# Altium PCB PCB1.PcbDoc
Units mm, origin at the board's own origin, x right, y up, seen from the top; angles counter-clockwise.
Board outline 152.4 x 101.6 mm, 2 copper layers (Top Layer, Bottom Layer); 35 components, 52 nets, 168 pads, 0 vias.
Unrouted connection lines stored in the file: 116.
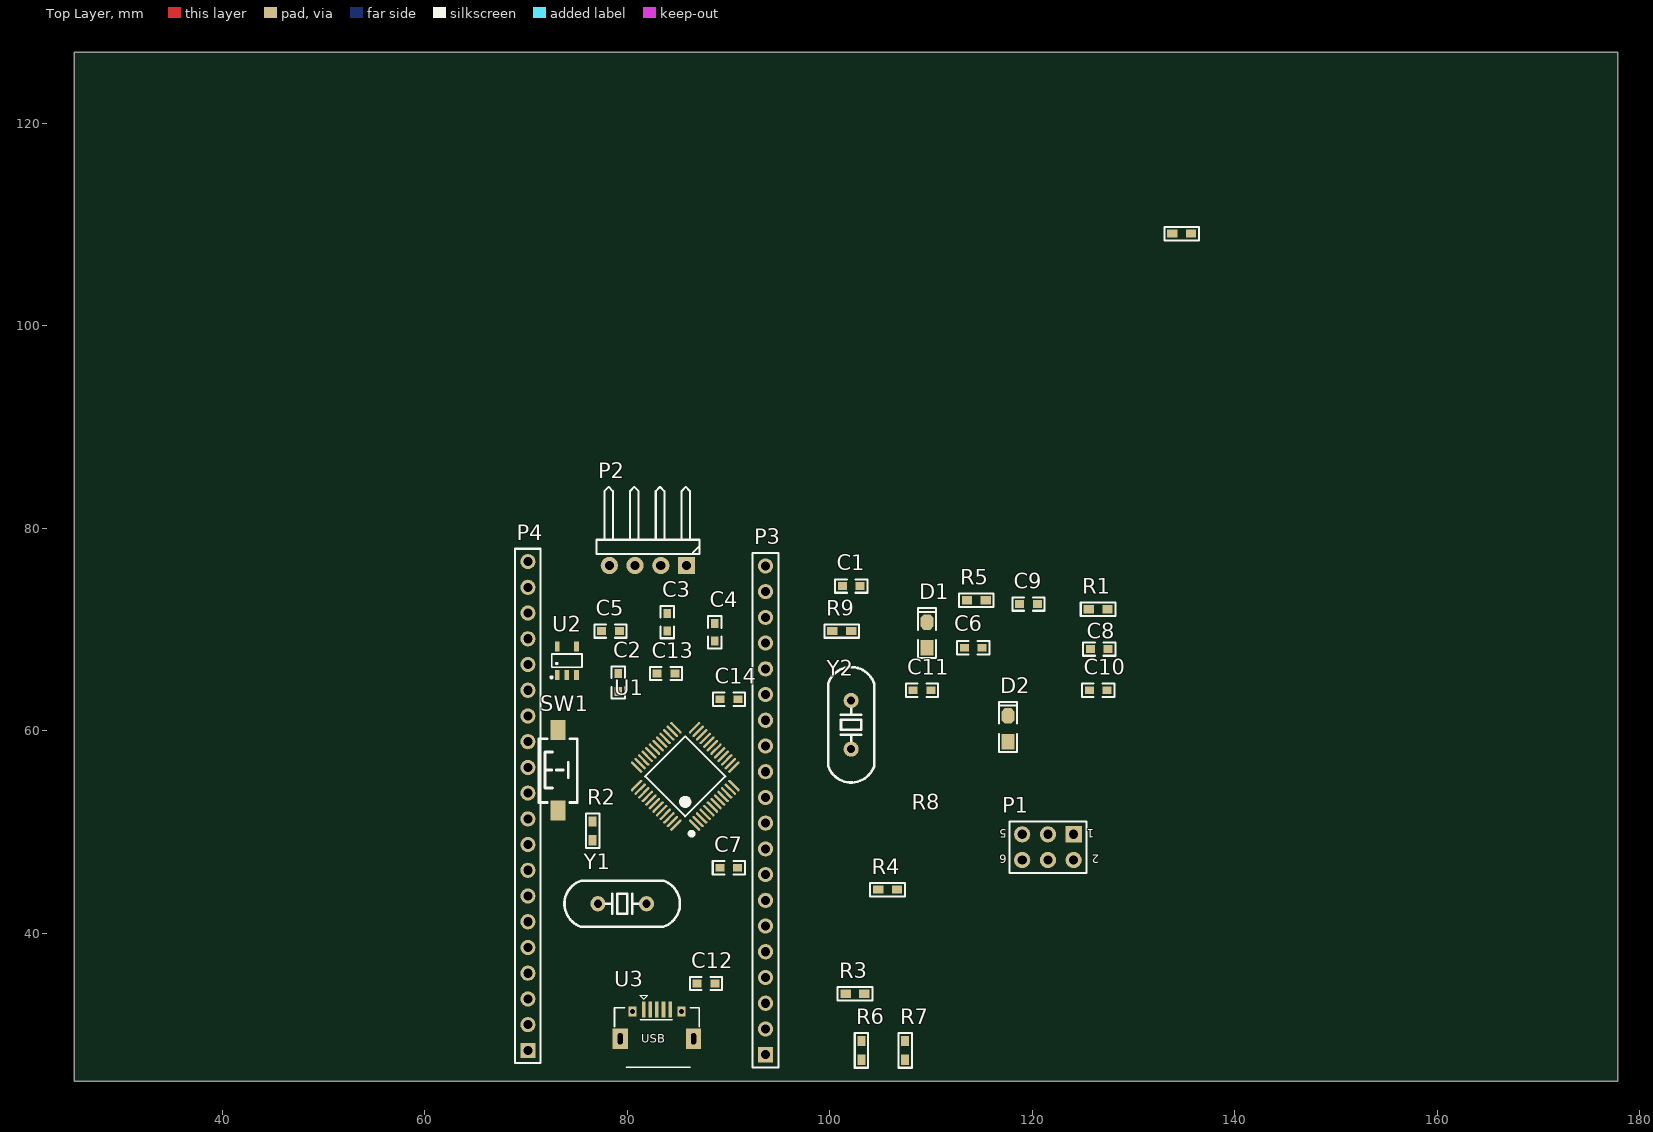
[diagram p0: Top Layer view]
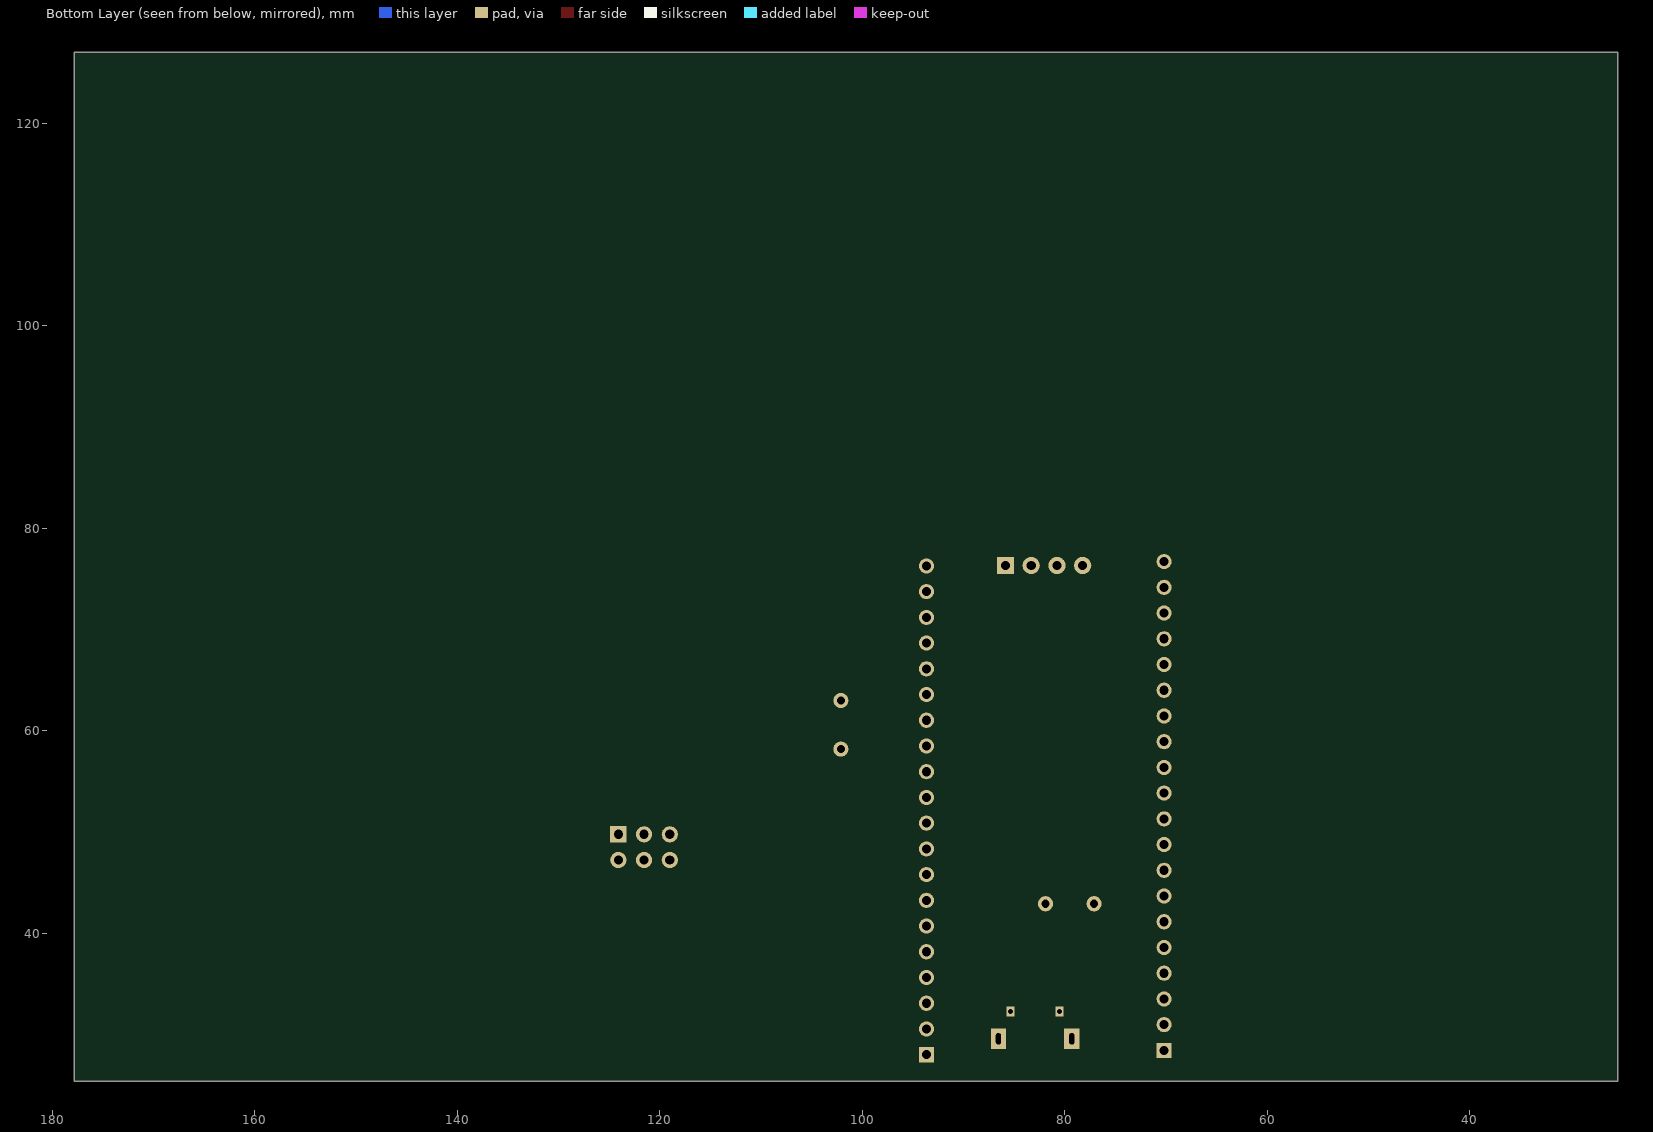
[diagram p1: Bottom Layer view, seen from below]

## Layer stack, top to bottom
Top Solder: solder mask 0.0102, Solder Resist, Dk 3.5
Top Layer: signal copper 0.0356
Dielectric 1: dielectric 0.32, FR-4, Dk 4.8
Bottom Layer: signal copper 0.0356
Bottom Solder: solder mask 0.0102, Solder Resist, Dk 3.5

## Board outline
25.4,25.4 177.8,25.4 177.8,127 25.4,127

## Design rules (kind name [scope] priority, off if disabled: settings)
Clearance [All] p1: gap=0.254 ignorepadtopadclearanceinfootprint=FALSE except(0: Arc-Hole Track-Hole SMDPad-Hole THPad-Hole Via-Hole Fill-Hole Poly-Hole Region-Hole Text-Hole)
PolygonConnect [All] p1: connectstyle=Relief reliefconductorwidth=0.254 reliefentries=4 polygonreliefangle="90 Angle" airgapwidth=0.254
RoomDefinition Sheet1 [InComponentClass('Sheet1')] p1: confinementstyle=ConfineIn formatcopy=TRUE lockcomponents=FALSE outline 135.433,47.625 316.586,47.625 316.586,101.473 135.433,101.473
RoutingVias [All] p1: holewidth=0.711 width=1.27 viastyle="Through Hole" minholewidth=0.711 minwidth=1.27 maxholewidth=0.711 maxwidth=1.27
SolderMaskExpansion [All] p1: expansion=0.102 istentingtop=FALSE
Width [All] p1: maxlimit=0.254 minlimit=0.254 preferedwidth=0.254
30 further rules are at their usual default settings.

## Components (designator, comment, footprint, x,y, rotation, side; value= is the part's Value field where it differs from the comment)
C1 "105 C0603" "C 0603" 102.133,74.295 r0 top value=104
C2 "105 C0603" "C 0603" 79.121,64.795 r90 top value=104
C3 "105 C0603" "C 0603" 83.947,70.739 r90 top value=104
C4 "105 C0603" "C 0603" 88.646,69.748 r90 top value=104
C5 "105 C0603" "C 0603" 78.359,69.85 r0 top value=104
C6 "105 C0603" "C 0603" 114.173,68.199 r0 top value=104
C7 "22P,C0603" "C 0603" 90.043,46.482 r0 top value=104
C8 "105 C0603" "C 0603" 126.619,68.072 r0 top value=104
C9 "105 C0603" "C 0603" 119.634,72.517 r0 top value=104
C10 "105 C0603" "C 0603" 126.492,64.008 r180 top value=104
C11 "105 C0603" "C 0603" 109.118,64.008 r0 top value=104
C12 "22P,C0603" "C 0603" 87.757,35.052 r180 top value=104
C13 "22P,C0603" "C 0603" 83.82,65.659 r180 top value=104
C14 "22P,C0603" "C 0603" 90.043,63.119 r180 top value=104
D1 "LED" "LED 0805G" 109.601,69.469 r90 top
D2 "LED" "LED 0805G" 117.602,60.198 r90 top
P1 "Header 3X2" HDR-3X2 124.079,49.784 r180 top
P2 "SWD" HDR-1X4_H 85.852,76.327 r180 top
P3 "Header 20" HDR1X20 93.658,28.023 r90 top
P4 "Header 20" HDR1X20 70.187,28.448 r90 top
R1 "10K R0603" "R 0603" 126.492,72.009 r0 top
R2 "10K R0603" "R 0603" 76.581,50.127 r90 top
R3 "10K R0603" "R 0603" 102.489,34.036 r0 top
R4 "10K R0603" "R 0603" 105.702,44.323 r0 top
R5 "10K R0603" "R 0603" 114.465,72.898 r0 top
R6 "20 R0603" "R 0603" 103.124,28.448 r270 top
R7 "20 R0603" "R 0603" 107.442,28.448 r90 top
R8 "4.7K R0603" "R 0603" 134.747,109.093 r0 top
R9 "1M, 0603" "R 0603" 101.181,69.85 r180 top
SW1 "SW-PB_V" "TSW SMD-3*6*2.5" 73.152,56.134 r90 top
U1 "stm32f103c8t6_48pin" "TQFP48 7x7_L" 85.725,55.499 r45 top
U2 "RT9193" SOT23-5L 74.041,66.929 r0 top
U3 "USB-mrico" USB-micro_B 82.931,29.591 r0 top
Y1 "32.768K" "XTAL-49S DIP" 79.502,42.926 r180 top
Y2 "8M" "XTAL-49S DIP" 102.108,60.592 r90 top

## Footprints (in the part's own frame and the unit in brackets; to place one, negate y for a bottom-side part, rotate by r counter-clockwise, add the part's x,y. Pads: shape width x height; smd on the part's side, far side on the other; paste and mask are expansions set on the pad)
"C 0603" [mil] "无极性贴片电容"
  rect 35x30 smd: 1(-35,0) 2(34,0)
  silkscreen extent -63,-26 62,26, body extent -41,-16 21,16, height 32
HDR1X20 [mm] "Connector; Header; 20 Position"
  rect 1.5x1.5 hole 0.9: 1(0,0)
  round 1.5 hole 0.9: 2(2.54,0) 3(5.08,0) 4(7.62,0) 5(10.16,0) 6(12.7,0) 7(15.24,0) 8(17.78,0) 9(20.32,0) 10(22.86,0) 11(25.4,0) 12(27.94,0) 13(30.48,0) 14(33.02,0) 15(35.56,0) 16(38.1,0) 17(40.64,0) 18(43.18,0) 19(45.72,0) 20(48.26,0)
  silkscreen extent -1.27,-1.27 49.53,1.27
HDR-1X4_H [mm] "弯脚排针，4脚"
  rect 1.7x1.7 hole 0.9: 1(0,0)
  round 1.7 hole 0.9: 2(2.54,0) 3(5.08,0) 4(7.62,0)
  silkscreen extent -1.27,-7.76 8.89,-1.14, body extent -1.27,-7.77 8.89,1.27, height 4.85
HDR-3X2 [mm] "双排排针，3x2脚"
  rect 1.6x1.6 hole 0.9: 1(0,0)
  round 1.6 hole 0.9: 2(0,2.54) 3(2.54,0) 4(2.54,2.54) 5(5.08,0) 6(5.08,2.54)
  silkscreen extent -1.27,-1.27 6.35,3.81, body extent -1.27,-1.27 6.35,3.81, height 8.5
"LED 0805G" [mil] "绿色0805LED"
  rect 60x50 smd: 1(-50,0)
  oct 60x50 smd: 2(50,0)
  silkscreen extent -90,-35 105,35, body extent -39,-25 39,25, height 32
"R 0603" [mil] "1/10W贴片电阻"
  rect 40x31.5 smd: 1(-36.5,0) 2(36.5,0)
  silkscreen extent -68,-26 67,26, body extent -31,-16 31,16, height 16
SOT23-5L [mm] "3x1.6x1.1mm(长宽高)"
  rect 0.45x1 smd: 1(-0.95,-1.4) 2(0,-1.4) 3(0.95,-1.4) 4(0.95,1.4) 5(-0.95,1.4)
  silkscreen extent -1.6,-1.73 1.5,0.66, body extent -1.5,-1.4 1.5,1.4, height 1.15
"TQFP48 7x7_L" [mm] "48脚，体宽：7x7mm, 脚距：0.5mm"
  oval 0.25x1.5 smd: 1(-2.75,-4.046) 2(-2.25,-4.046) 3(-1.75,-4.046) 4(-1.25,-4.046) 5(-0.75,-4.046) 6(-0.25,-4.046) 7(0.25,-4.046) 8(0.75,-4.046) 9(1.25,-4.046) 10(1.75,-4.046) 11(2.25,-4.046) 12(2.75,-4.046) 25(2.75,4.046) 26(2.25,4.046) 27(1.75,4.046) 28(1.25,4.046) 29(0.75,4.046) 30(0.25,4.046) 31(-0.25,4.046) 32(-0.75,4.046) 33(-1.25,4.046) 34(-1.75,4.046) 35(-2.25,4.046) 36(-2.75,4.046)
  oval 1.5x0.25 smd: 13(4.046,-2.75) 14(4.046,-2.25) 15(4.046,-1.75) 16(4.046,-1.25) 17(4.046,-0.75) 18(4.046,-0.25) 19(4.046,0.25) 20(4.046,0.75) 21(4.046,1.25) 22(4.046,1.75) 23(4.046,2.25) 24(4.046,2.75) 37(-4.046,2.75) 38(-4.046,2.25) 39(-4.046,1.75) 40(-4.046,1.25) 41(-4.046,0.75) 42(-4.046,0.25) 43(-4.046,-0.25) 44(-4.046,-0.75) 45(-4.046,-1.25) 46(-4.046,-1.75) 47(-4.046,-2.25) 48(-4.046,-2.75)
  silkscreen extent -3.68,-4.57 2.79,2.79, body extent -4.5,-4.5 4.5,4.5, height 1.05
"TSW SMD-3*6*2.5" [mm] "3*6*2.5mm"
  rect 2x1.5 smd: 1(-3.996,-0.02) 2(3.937,0)
  silkscreen extent -3.21,-1.9 3.09,1.9, body extent -4,-1.88 4,1.62, height 2.59
USB-micro_B [mm] "micro型USB ，5.7*7.8*2.5mm"
  rect 0.35x1.6 smd: 1(-1.3,2.9) 2(-0.65,2.9) 3(0,2.9) 4(0.65,2.9) 5(1.3,2.9)
  rect 1.5x2 hole 0.5 slot 1.1 at 90 deg: 5(-3.625,0) 5(3.625,0)
  rect 0.8x1 hole 0.5: 5(-2.425,2.71) 5(2.425,2.71)
  silkscreen extent -4.19,-2.79 4.19,4.3, body extent -4,-2.71 4,2.89, height 2.8
"XTAL-49S DIP" [mm]
  round 1.5 hole 0.8: 1(-2.4,0) 2(2.4,0)
  silkscreen extent -5.7,-2.28 5.7,2.28, body extent -5.68,-2.35 5.68,2.3, height 3.5

## Part data
C1 C2 C3 C4 C5 C6 C7 C8 C9 C10 C11 C12 C13 C14: library part Cap, LatestRevisionDate=17-Jul-2002, LatestRevisionNote="Re-released for DXP Platform.", Published=8-Jun-2000, Publisher="Altium Limited"
P1: library part "Header 2*3", LatestRevisionDate=17-Jul-2002, LatestRevisionNote="Re-released for DXP Platform.", Publisher="Altium Limited"
P2: library part "Header 1*4", LatestRevisionDate=17-Jul-2002, LatestRevisionNote="Re-released for DXP Platform.", Publisher="Altium Limited"
P3 P4: library part "Header1* 20", LatestRevisionDate=17-Jul-2002, LatestRevisionNote="Re-released for DXP Platform.", Publisher="Altium Limited"
R1 R2 R3 R4 R5 R6 R7 R8 R9: library part Res2, LatestRevisionDate=17-Jul-2002, LatestRevisionNote="Re-released for DXP Platform.", Published=8-Jun-2000, Publisher="Altium Limited"
U2: library part RT9193X_5P, ICA_MFR_NAME=RICHTEK, ICA_PARTNUM=$$2191094$$RT9193-15CU5, Part Number=TMP-13
U3: library part usb-STM
Y1 Y2: library part XTAL, LatestRevisionDate=17-Jul-2002, LatestRevisionNote="Re-released for DXP Platform.", Published=8-Jun-2000, Publisher="Altium Limited"

## Nets (pads, with @x,y where several pads share a name; then routed paths per layer and width w, separated by ;. In a path a pad name is that pad's centre, name@x,y a point inside that pad or via, vN(x,y) a via of type N, cw(c..) or ccw(c..) an arc to the next point about the centre after c; other vN are vias at no path point)
5V: C5.2 P4.3 R8.2 U2.1 U2.3 U3.5
\: P4.10 U1.39
BOOT0: R3.2 U1.44
BOOT1: R4.1 U1.20
GND: C2.1 C3.1 C4.1 C5.1 C6.1 C7.2 C8.1 C9.1 C10.1 C11.1 C12.2 C13.2 C14.1 C14.2 P1.5 P1.6 P3.19 P3.20 P4.2 R1.2 R9.2 SW1.1 U1.6 U1.8 U1.23 U1.35 U1.47 U2.2 U3.1 U3.4 Y2.1
NetC1_1: C1.1 P2.4
NetC1_2: C1.2 P2.1
NetC6_2: C6.2 U2.4
NetD1_2: D1.2 R1.1
NetD2_2: D2.2 R5.1
NetP1_3: P1.3 R3.1
NetP1_4: P1.4 R4.2
NetR6_2: R6.2 U3.2
NetR7_2: R7.2 U3.3
OSCIN: C13.1 R9.1 U1.5 Y2.2
PA0: P3.5 U1.10
PA1: P3.6 U1.11
PA2: P3.7 U1.12
PA3: P3.8 U1.13
PA4: P3.9 U1.14
PA5: P3.10 U1.15
PA6: P3.11 U1.16
PA7: P3.12 U1.17
PA8: P4.16 U1.29
PA9: P4.15 U1.30
PA10: P4.14 U1.31
PA11: P4.13 R6.1 U1.32
PA12: P4.12 U1.33
PA13: P4.11 R7.1 R8.1
PA15: C12.1 U1.38 Y1.1
PB0: P3.13 U1.18
PB1: P3.14 U1.19
PB4: P4.9 U1.40
PB5: P4.8 U1.41
PB6: P4.7 U1.42
PB7: P4.6 U1.43
PB8: P4.5 U1.45
PB9: P4.4 U1.46
PB10: P3.15 U1.21
PB11: P3.16 U1.22
PB12: P4.20 U1.25
PB13: P4.19 U1.26
PB14: P4.18 U1.27
PB15: P4.17 U1.28
PC13: P3.2 R5.2 U1.2
PC14: C7.1 P3.3 U1.3 Y1.2
PC15: P3.4 U1.4
RESET: C2.2 P3.17 R2.1 SW1.2 U1.7
SWDCLK: P2.3 U1.37
SWDIO: P2.2 U1.34
VBAT: P3.1 U1.1
VCC3V3: C3.2 C4.2 C8.2 C9.2 C10.2 C11.2 D1.1 D2.1 P1.1 P1.2 P3.18 P4.1 R2.2 U1.9 U1.24 U1.36 U1.48 U2.5

## Silkscreen, mask and mechanical layers (free items; w line width, h text height)
Drill Drawing:
  lines w0.254: 6.35,21.717 7.874,23.241 ; 7.874,132.207 8.255,131.826 ; 194.691,130.429 195.961,131.699

## Text inside footprints (layer, text, board x,y; h text height)
P1: Top Overlay "1" at 126.111,50.292 h0.81 r180; Top Overlay "2" at 126.619,47.752 h0.81 r180; Top Overlay "5" at 117.475,50.292 h0.81 r180; Top Overlay "6" at 117.475,47.752 h0.81 r180
U3: Top Overlay "USB" at 81.407,29.189 h0.81